# Altium PCB TEENSY 1.1.PcbDoc
Units mil, origin at the board's own origin, x right, y up, seen from the top; angles counter-clockwise.
Board outline 2955 x 3915 mil, 2 copper layers (Top Layer, Bottom Layer); 7 components, 14 nets, 103 pads, 3 vias.
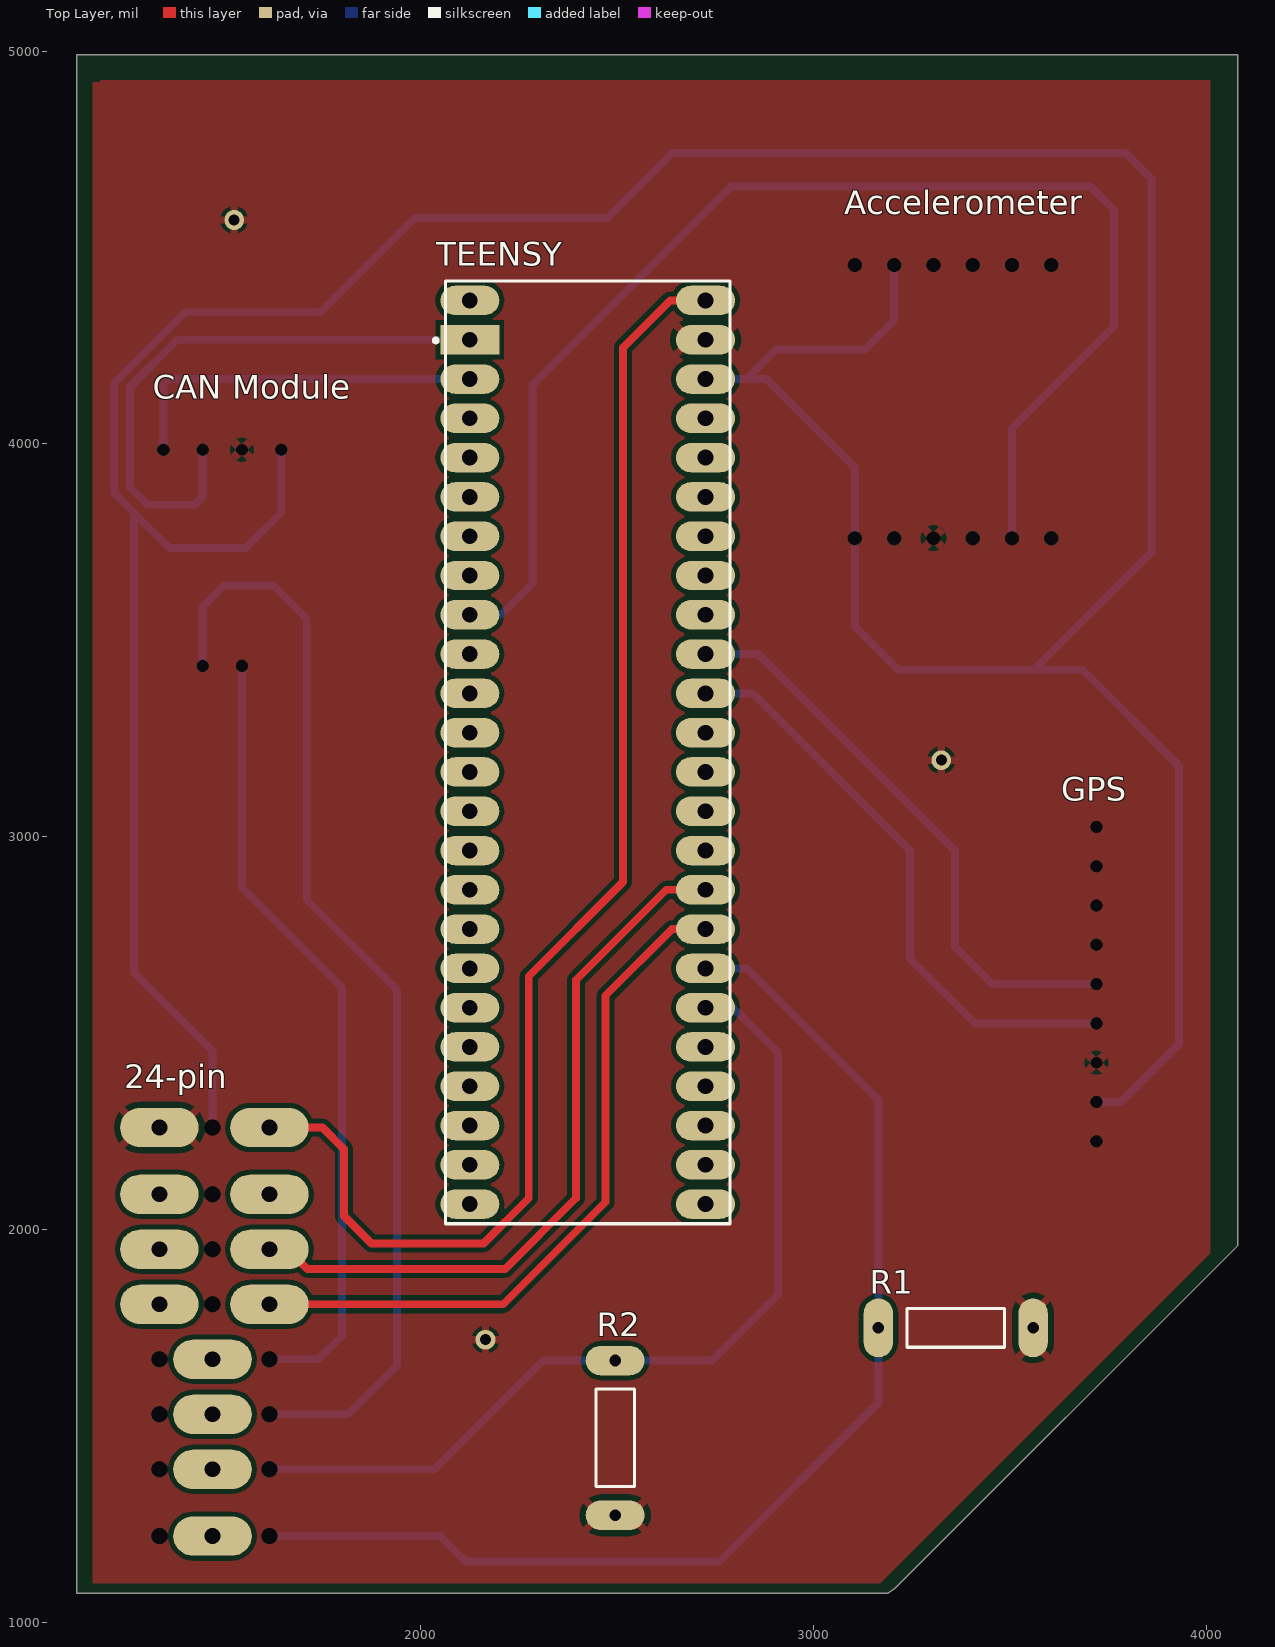
[diagram p0: Top Layer view]
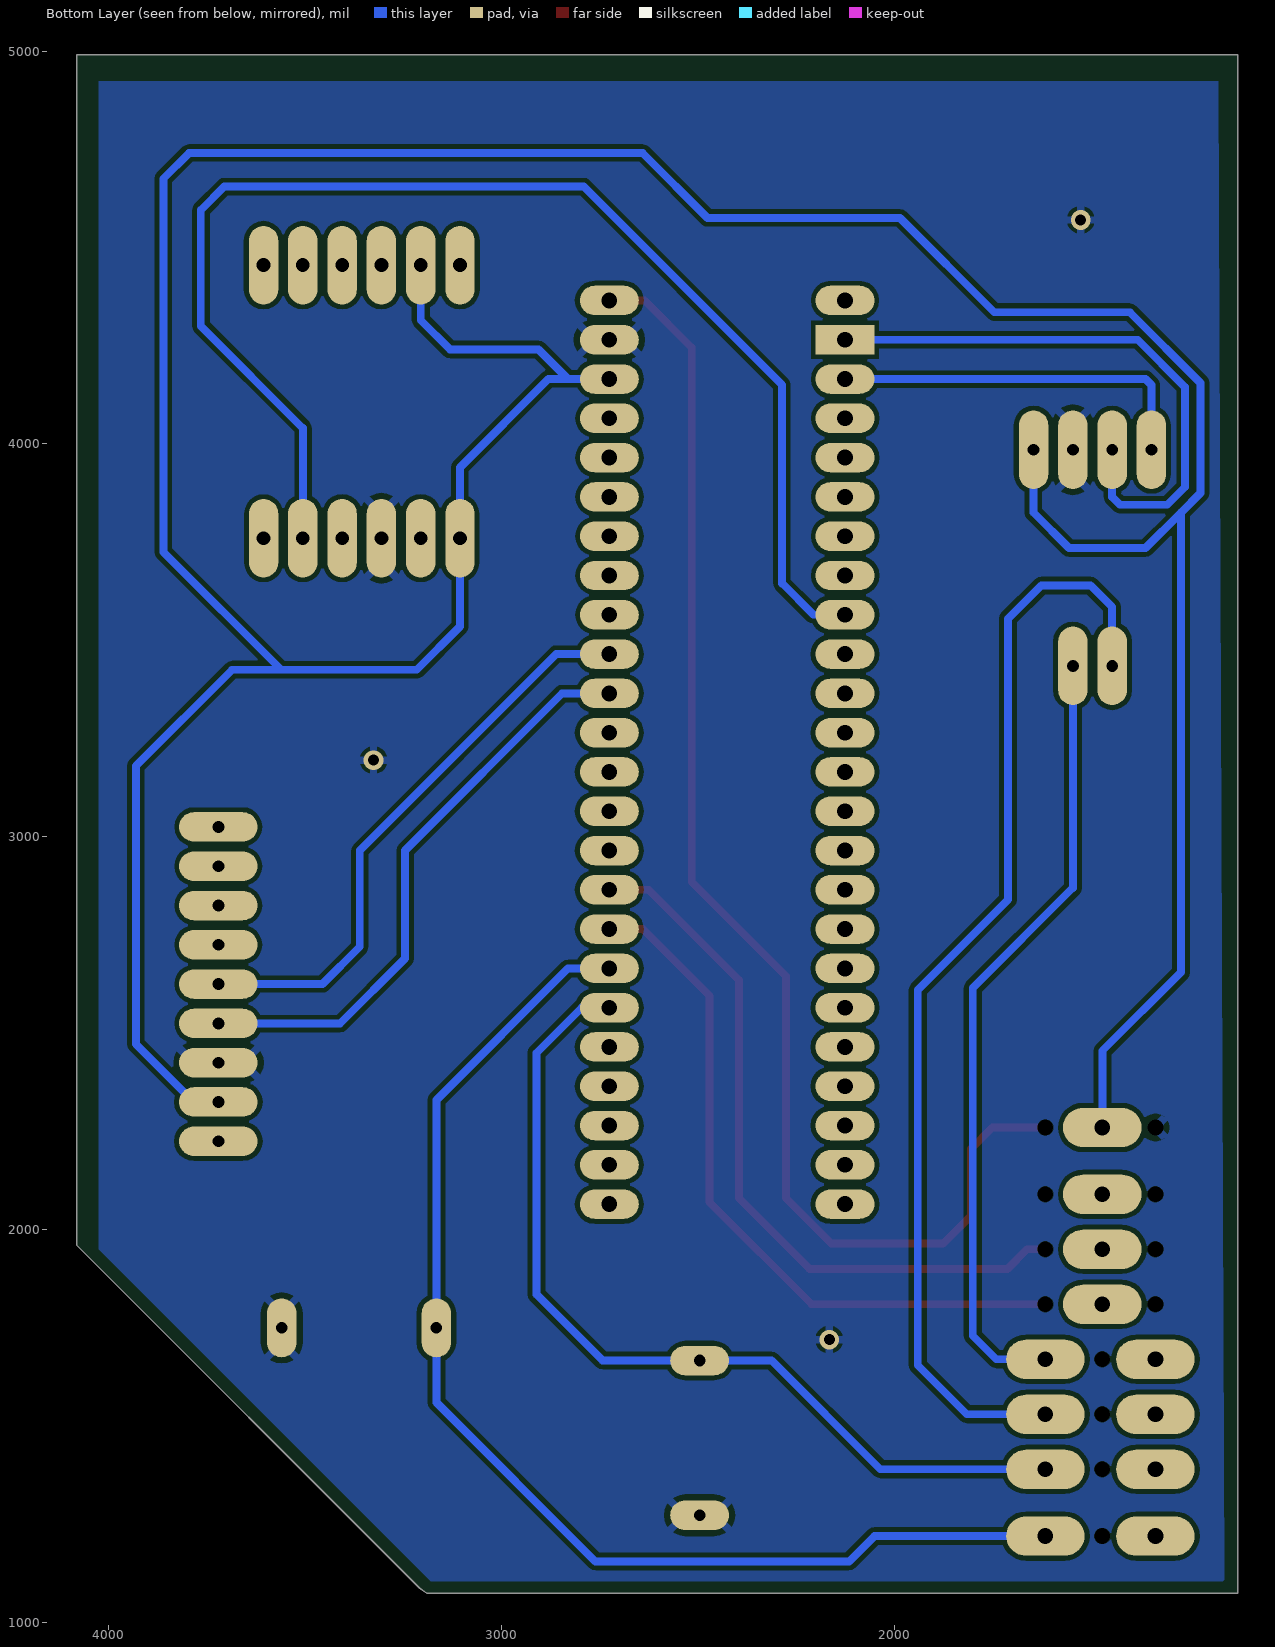
[diagram p1: Bottom Layer view, seen from below]

## Layer stack, top to bottom
Top Solder: solder mask 0.4, Solder Resist, Dk 3.5
Top Layer: signal copper 1.4
Dielectric 1: dielectric 12.6, FR-4, Dk 4.8
Bottom Layer: signal copper 1.4
Bottom Solder: solder mask 0.4, Solder Resist, Dk 3.5

## Board outline
1125,1075 3190,1075 3207.5,1087.5 4080,1960 4080,4990 1125,4990

## Design rules (kind name [scope] priority, off if disabled: settings)
AcuteAngle [All] p1: minimum=3.00000000000000E+0001 checktracksonly=FALSE
Clearance [All] p1: gap=12 ignorepadtopadclearanceinfootprint=TRUE except(0: Arc-Hole Track-Hole SMDPad-Hole THPad-Hole Via-Hole Fill-Hole Poly-Hole Region-Hole; 6: SMDPad-SMDPad SMDPad-THPad SMDPad-Via; 10: Arc-Text Track-Text SMDPad-Text THPad-Text Via-Via Via-Text Fill-Text Poly-Text Region-Text Text-Text; 15: Arc-Arc Arc-Track Arc-SMDPad Arc-THPad Arc-Via Track-Track Track-SMDPad Track-THPad Track-Via THPad-THPad THPad-Via)
ComponentClearance [All] p1: gap=20 collisioncheckmode=3 verticalgap=20 showdistances=TRUE
DiffPairsRouting [All] p1: maxlimit=50 minlimit=12 mostfreqgap=12 toplayer_minwidth=12 toplayer_maxwidth=26 toplayer_prefwidth=20 bottomlayer_minwidth=12 bottomlayer_maxwidth=26 bottomlayer_prefwidth=20 maxuncoupledlength=20
Height [All] p1: minheight=0 maxheight=1000 prefheight=1000
HoleSize [All] p1: absolutevalues=TRUE maxlimit=127.95 minlimit=11.81 maxpercent=80.000 minpercent=20.000
HoleToHoleClearance [All] p1: gap=20 allowstackedmicrovias=TRUE
LayerPairs [All] p1: enforce=FALSE
MinimumAnnularRing [All] p1: minimumring=8
MinimumSolderMaskSliver [All] p1: minsoldermaskwidth=0
PermittedLayers [All] p1: toplayerpermitted=TRUE bottomlayerpermitted=TRUE
PlaneConnect [All] p1: planeconnectstyle=Relief reliefexpansion=20 reliefentries=4 reliefconductorwidth=20 reliefairgap=10
PolygonConnect [All] p1: thpad.connectstyle=Relief thpad.reliefconductorwidth=20 thpad.reliefentries=4 thpad.polygonreliefangle="45 Angle" thpad.airgapwidth=15 smdpad.connectstyle=Relief smdpad.reliefconductorwidth=10 smdpad.reliefentries=4 smdpad.polygonreliefangle="90 Angle" smdpad.airgapwidth=10 smdpad.conductorbypadedge=TRUE smdpad.mindistance=15 smdpad.enablemindistance=FALSE via.connectstyle=Relief via.reliefconductorwidth=20 via.reliefentries=4 via.polygonreliefangle="90 Angle" via.airgapwidth=10
RoutingCorners [All] p1: cornerstyle=45-Degree minsetback=20 maxsetback=100
RoutingVias [All] p1: holewidth=31.5 width=50 viastyle="Through Hole" minholewidth=23.62 minwidth=43.62 maxholewidth=39.37 maxwidth=80
SMDEntry [All] p1: side=TRUE corner=TRUE anyangle=TRUE
SMDNeckDown [All] p1: percent=100.000
SilkToSilkClearance [All] p1: silktosilkclearance=0
SilkToSolderMaskClearance [All] p1: minsilkscreentomaskgap=0 clearancetoexposedcopper=TRUE
SolderMaskExpansion [All] p1: expansion=0 istentingtop=FALSE
UnRoutedNet [All] p1: checkbadconnections=TRUE
Width [All] p1: maxlimit=50 minlimit=20 preferedwidth=20 minimp=50.000000 maximp=50.000000 favimp=50.000000
18 further rules are at their usual default settings.

## Components (designator, comment, footprint, x,y, rotation, side; value= is the part's Value field where it differs from the comment)
24-pin "DJ7242" DJ7242-Footprint-1 1260,2260 r270 top
Accelerometer "Accelerometer Header" "Accelerometer Header-Footprint-1" 3105,3665 r0 top
"CAN Module" "CAN Module" "CAN Module-Footprint-1" 1345,3985 r270 top
GPS "GPS" GPS-Footprint-1 3575,3070 r270 top
R1 "MBB02070C1002FCT00" FP-MBB0207-MFG 3361.85,1750 r180 top
R2 "MBB02070C1002FCT00" FP-MBB0207-MFG 2495,1470 r90 top
TEENSY "TEENSY 4.1" FP-DEV-16996-MFG 2425,3215 r270 top

## Footprints (in the part's own frame and the unit in brackets; to place one, negate y for a bottom-side part, rotate by r counter-clockwise, add the part's x,y. Pads: shape width x height; smd on the part's side, far side on the other; paste and mask are expansions set on the pad)
"Accelerometer Header-Footprint-1" [mil]
  round 0 / inner round 60 / far side oval 75x200 hole 35: 1(0,95) 2(100,95) 3(200,95) 4(300,95) 5(400,95) 6(500,95) 7(0,790) 8(100,790) 9(200,790) 10(300,790) 11(400,790) 12(500,790)
"CAN Module-Footprint-1" [mil]
  round 0 / inner round 60 / far side oval 200x75 hole 30: 1(0,300) 2(0,200) 3(0,100) 4(0,0) 5(550,200) 6(550,100)
DJ7242-Footprint-1 [mil]
  oval 100x200 / inner round 60 / far side round 0 hole 40: 1(0,355) 2(170,355) 3(310,355) 4(450,355) 13(590,210) 14(730,210) 15(870,210) 16(1040,210) 17(0,75) 18(170,75) 19(310,75) 20(450,75)
  round 0 / inner round 60 / far side oval 100x200 hole 40: 5(590,355) 6(730,355) 7(870,355) 8(1040,355) 9(0,210) 10(170,210) 11(310,210) 12(450,210) 21(590,75) 22(730,75) 23(870,75) 24(1040,75)
FP-DEV-16996-MFG [mm]
  rect 1.905x3.81 / inner rect 1.57x1.57 / far side rect 1.905x3.81 hole 1.02 paste-2539.97 mask+0: 0(-26.67,-7.62)
  oval 1.905x3.81 / inner round 1.57 / far side oval 1.905x3.81 hole 1.02 paste-2539.97 mask+0: 1(-24.13,-7.62) 2(-21.59,-7.62) 3(-19.05,-7.62) 4(-16.51,-7.62) 5(-13.97,-7.62) 6(-11.43,-7.62) 7(-8.89,-7.62) 8(-6.35,-7.62) 9(-3.81,-7.62) 10(-1.27,-7.62) 11(1.27,-7.62) 12(3.81,-7.62) 13(3.81,7.62) 14(1.27,7.62) 15(-1.27,7.62) 16(-3.81,7.62) 17(-6.35,7.62) 18(-8.89,7.62) 19(-11.43,7.62) 20(-13.97,7.62) 21(-16.51,7.62) 22(-19.05,7.62) 23(-21.59,7.62) 24(8.89,-7.62) 25(11.43,-7.62) 26(13.97,-7.62) 27(16.51,-7.62) 28(19.05,-7.62) 29(21.59,-7.62) 30(24.13,-7.62) 31(26.67,-7.62) 32(29.21,-7.62) 33(29.21,7.62) 34(26.67,7.62) 35(24.13,7.62) 36(21.59,7.62) 37(19.05,7.62) 38(16.51,7.62) 39(13.97,7.62) 40(11.43,7.62) 41(8.89,7.62) 42(-29.21,7.62) 43(-26.67,7.62) 44(-24.13,7.62) 45(6.35,7.62) 46(-29.21,-7.62) 47(6.35,-7.62)
  silkscreen extent -30.48,-9.94 30.48,9.19, body extent -30.58,-9.29 30.58,9.29, height 0.25
FP-MBB0207-MFG [mm]
  oval 1.905x3.81 / inner rect 1.25x1.25 / far side oval 1.905x3.81 hole 0.75 paste-2539.97 mask+0: 1(-5,0)
  oval 1.905x3.81 / inner round 1.25 / far side oval 1.905x3.81 hole 0.75 paste-2539.97 mask+0: 2(5,0)
  silkscreen extent -3.15,-1.25 3.15,1.25, body extent -5.72,-1.35 5.72,1.35, height 0.25
GPS-Footprint-1 [mil]
  round 0 / inner round 60 / far side oval 75x200 hole 30: 1(45,145) 2(145,145) 3(245,145) 4(345,145) 5(445,145) 6(545,145) 7(645,145) 8(745,145) 9(845,145)

## Part data
24-pin: library part CMP-00030-00002-4, "24-pin connector"
Accelerometer: library part CMP-002-00071-3, "Header for Adafruit Accelerometer"
"CAN Module": library part CMP-00030-00003-1, "CAN waveshare"
GPS: library part CMP-002-00072-2, "Adafruit GPS chip"
R1 R2: library part CMP-02408-000035-1, "RES 10K OHM 0.6W 1% AXIAL", Case/Package=Conformal, Max Operating Temperature=155°C, Max Power Dissipation=600mW, Min Operating Temperature=-55°C, Resistance=10kR, Resistance Tolerance=1%, Resistor Type="Metal Film", Temperature Coefficient=50ppm/°C, Voltage Rating=300V, Construction=Cylindrical, Contact Plating=Tin, Diameter=2.5mm, Features="Automotive AEC-Q200", Lead Free="Lead Free", Length=6.5mm, Military Standard=Not, Number of Terminations=2, Packaging="Tape and Reel", Power Rating=600mW, Radiation Hardening=No, RoHS Compliant=Yes, Series="MBB 0207 - Professional", Technology="THIN FILM", Termination=Axial, Tolerance=1%, Voltage Rating (DC)=300V
TEENSY: library part CMP-157412-000001-1, "TEENSY 4.1 (HEADERS)"

## Via types
v1: diameter 50, hole 28, Top Layer to Bottom Layer, 3 vias

## Nets (pads, with @x,y where several pads share a name; then routed paths per layer and width w, separated by ;. In a path a pad name is that pad's centre, name@x,y a point inside that pad or via, vN(x,y) a via of type N, cw(c..) or ccw(c..) an arc to the next point about the centre after c; other vN are vias at no path point)
3.3V: 24-pin.9 "CAN Module.1" Accelerometer.1 Accelerometer.8 GPS.8 TEENSY.44 | length 10297.6
  Bottom Layer w20: 24-pin.9 1470,2455 1270,2655 1270,3825 ; 1645,3985 1645,3825 1555,3735 1360,3735 1270,3825 ; TEENSY.44 2830,4165 ; Accelerometer.8 3205,4315 3130,4240 2905,4240 2830,4165 ; GPS.8 3782.5,2325 3930,2472.5 3930,3180 3685,3425 3560,3425 ; 1270,3825 1220,3875 1220,4155 1400,4335 1745,4335 1985,4575 2475,4575 2640,4740 3795,4740 3860,4675 3860,3725 3560,3425 ; 2830,4165 2880,4165 3105,3940 Accelerometer.1 3105,3535 3215,3425 3560,3425
"AX RX": Accelerometer.5 TEENSY.7 | length 3354.9
  Bottom Layer w20: TEENSY.7 2205,3565 2285,3645 2285,4150 2790,4655 3705,4655 3765,4595 3765,4300 3505,4040 Accelerometer.5
"BLPS RD": 24-pin.8 R1.2 TEENSY.39 | length 3093.4
  Bottom Layer w20: 24-pin.8 2050,1220 2115,1155 2760,1155 3165,1560 R1.2 3165,2330 2830,2665 TEENSY.39
"CAN RX": "CAN Module.3" TEENSY.0 | length 1501.6
  Bottom Layer w20: 1445,3985 1445,3865 1425,3845 1305,3845 1260,3890 1260,4145 1380,4265 TEENSY.0
"CAN TX": "CAN Module.4" TEENSY.1 | length 951.2
  Bottom Layer w20: 1345,3985 1345,4150 1360,4165 TEENSY.1
CANH: 24-pin.6 "CAN Module.6" | length 2845
  Bottom Layer w20: 1445,3435 1445,3585 1500,3640 1625,3640 1710,3555 1710,2840 1940,2610 1940,1655 1815,1530 24-pin.6
CANL: 24-pin.5 "CAN Module.5" | length 2020.5
  Bottom Layer w20: 1545,3435 1545,2870 1800,2615 1800,1730 1740,1670 24-pin.5
"COOL RD": 24-pin.7 R2.2 TEENSY.38 | length 2327
  Bottom Layer w20: 24-pin.7 2035,1390 2311.85,1666.85 R2.2 2741.85,1666.85 2910,1835 2910,2450 2795,2565 TEENSY.38
"DAMP POT 1": 24-pin.4 TEENSY.40 | length 1813.1
  Top Layer w20: 24-pin.4 2210,1810 2470,2070 2470,2595 2640,2765 TEENSY.40
"DAMP POT 2": 24-pin.3 TEENSY.41 | length 1855.5
  Top Layer w20: 24-pin.3 1661.57,1950 1711.57,1900 2215,1900 2395,2080 2395,2635 2625,2865 TEENSY.41
GND: 24-pin.17 "CAN Module.2" Accelerometer.3 GPS.7 R1.1 R2.1 TEENSY.43
  other v1: 2165,1720 3325,3195 1525,4570
"GPS RX": GPS.6 TEENSY.16 | length 1504
  Bottom Layer w20: TEENSY.16 2845,3365 3245,2965 3245,2690 3410,2525 GPS.6
"GPS TX": GPS.5 TEENSY.17 | length 1486.5
  Bottom Layer w20: TEENSY.17 2860,3465 3360,2965 3360,2720 3455,2625 GPS.5
VIN: 24-pin.1 TEENSY.42 | length 3453.5
  Top Layer w20: 24-pin.1 1750,2260 1805,2205 1805,2035 1875,1965 2160,1965 2275,2080 2275,2645 2515,2885 2515,4245 2635,4365 TEENSY.42
pads on no net: 24-pin.2 24-pin.10 24-pin.11 24-pin.12 24-pin.13 24-pin.14 24-pin.15 24-pin.16 24-pin.18 24-pin.19 24-pin.20 24-pin.21 24-pin.22 24-pin.23 24-pin.24 Accelerometer.2 Accelerometer.4 Accelerometer.6 Accelerometer.7 Accelerometer.9 Accelerometer.10 Accelerometer.11 Accelerometer.12 GPS.1 GPS.2 GPS.3 GPS.4 GPS.9 TEENSY.2 TEENSY.3 TEENSY.4 TEENSY.5 TEENSY.6 TEENSY.8 TEENSY.9 TEENSY.10 TEENSY.11 TEENSY.12 TEENSY.13 TEENSY.14 TEENSY.15 TEENSY.18 TEENSY.19 TEENSY.20 TEENSY.21 TEENSY.22 TEENSY.23 TEENSY.24 TEENSY.25 TEENSY.26 TEENSY.27 TEENSY.28 TEENSY.29 TEENSY.30 TEENSY.31 TEENSY.32 TEENSY.33 TEENSY.34 TEENSY.35 TEENSY.36 TEENSY.37 TEENSY.45 TEENSY.46 TEENSY.47

## Polygon pours and split planes (outlines as drawn)
GND on Bottom Layer "GND_L02_P000" (solid, pour order 0): 4025,4922.55 4025,1950 3180,1105 1160,1105 1175,4922.55
GND on Top Layer "GND_L01_P001" (solid, pour order 1): 1180,4920 1185,4925 4010,4925 4010,1940 3170,1100 1165,1100 1165,4920